# Altium PCB PCB5.PcbDoc
Units mm, origin at the board's own origin, x right, y up, seen from the top; angles counter-clockwise.
Board outline 110.24 x 88.14 mm, 2 copper layers (Top Layer, Bottom Layer); 52 components, 59 nets, 232 pads, 8 vias.
Unrouted connection lines stored in the file: 9.
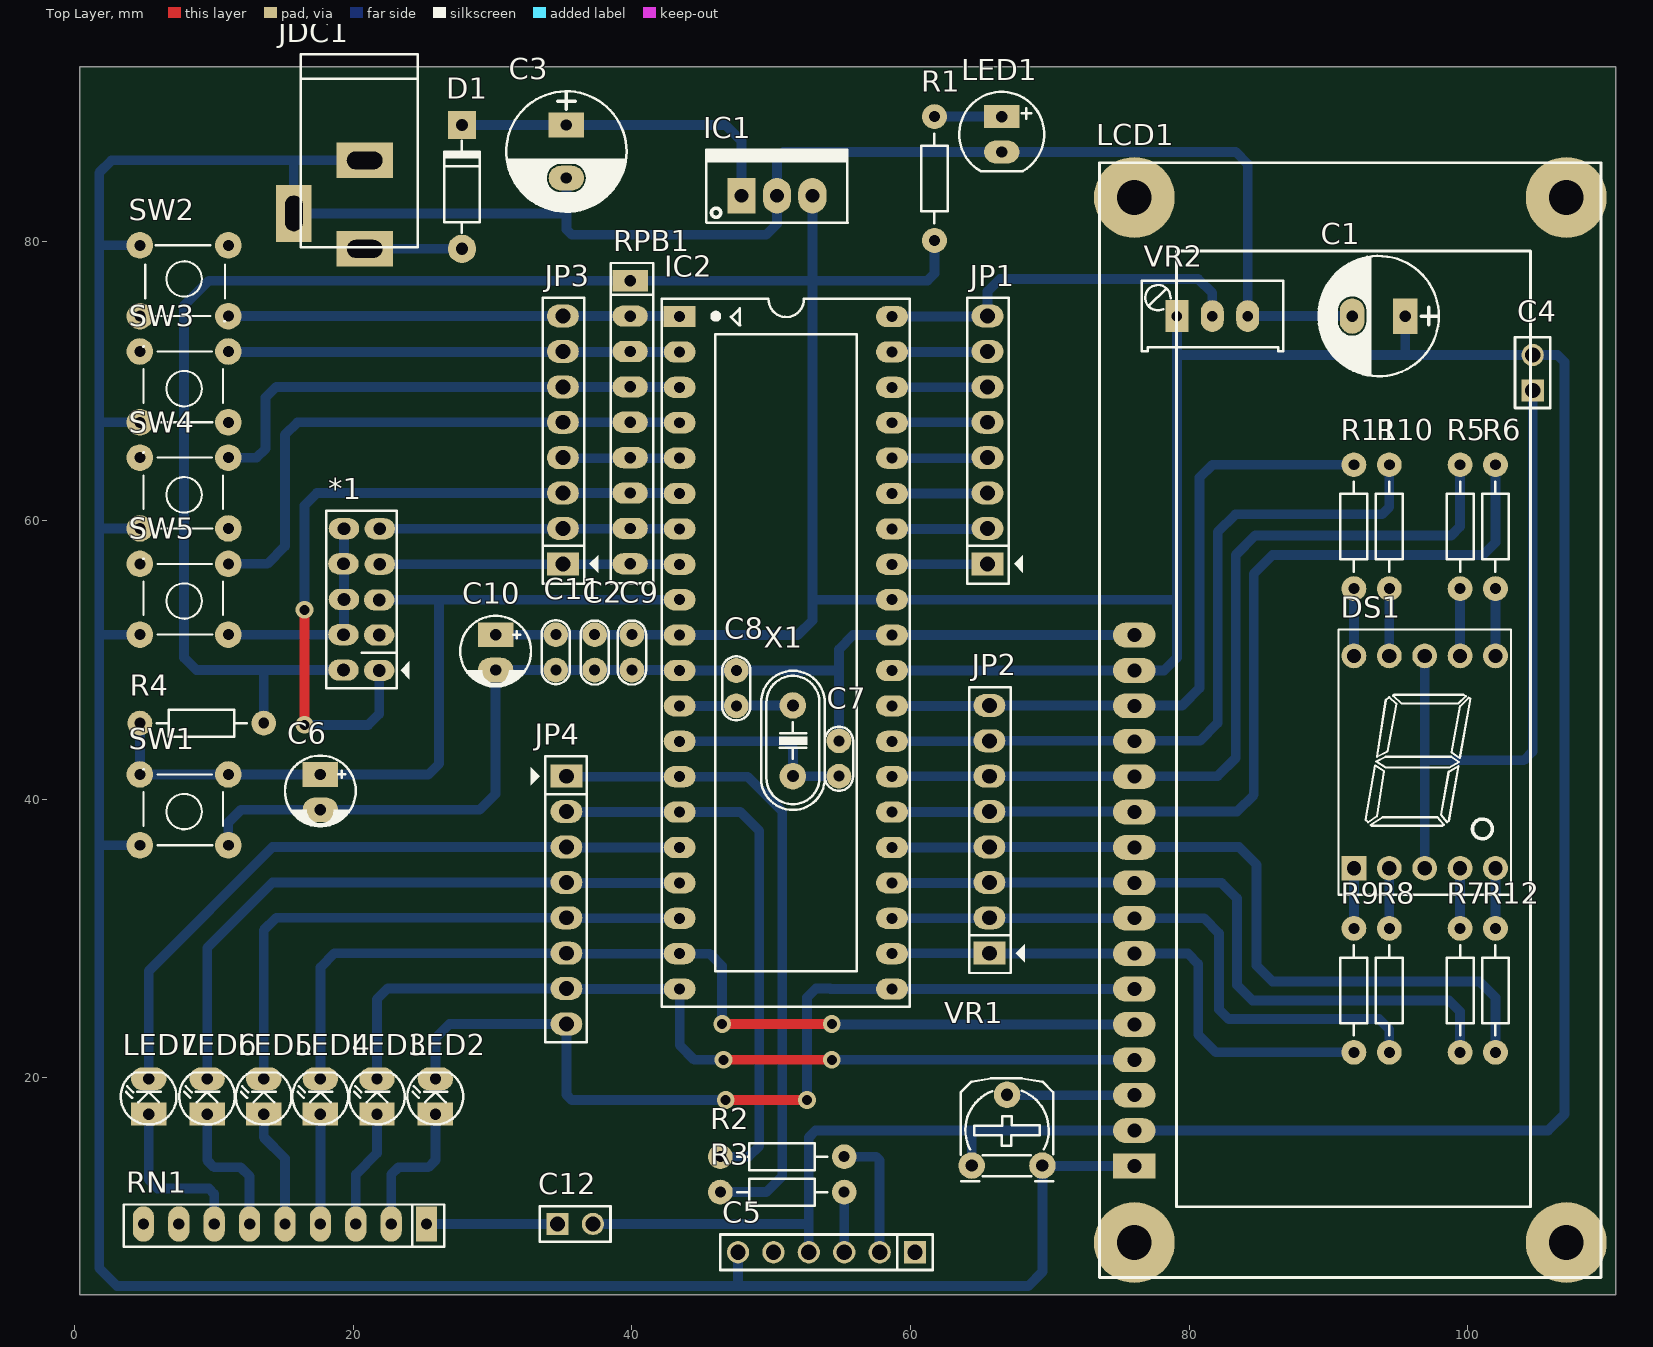
[diagram p0: Top Layer view]
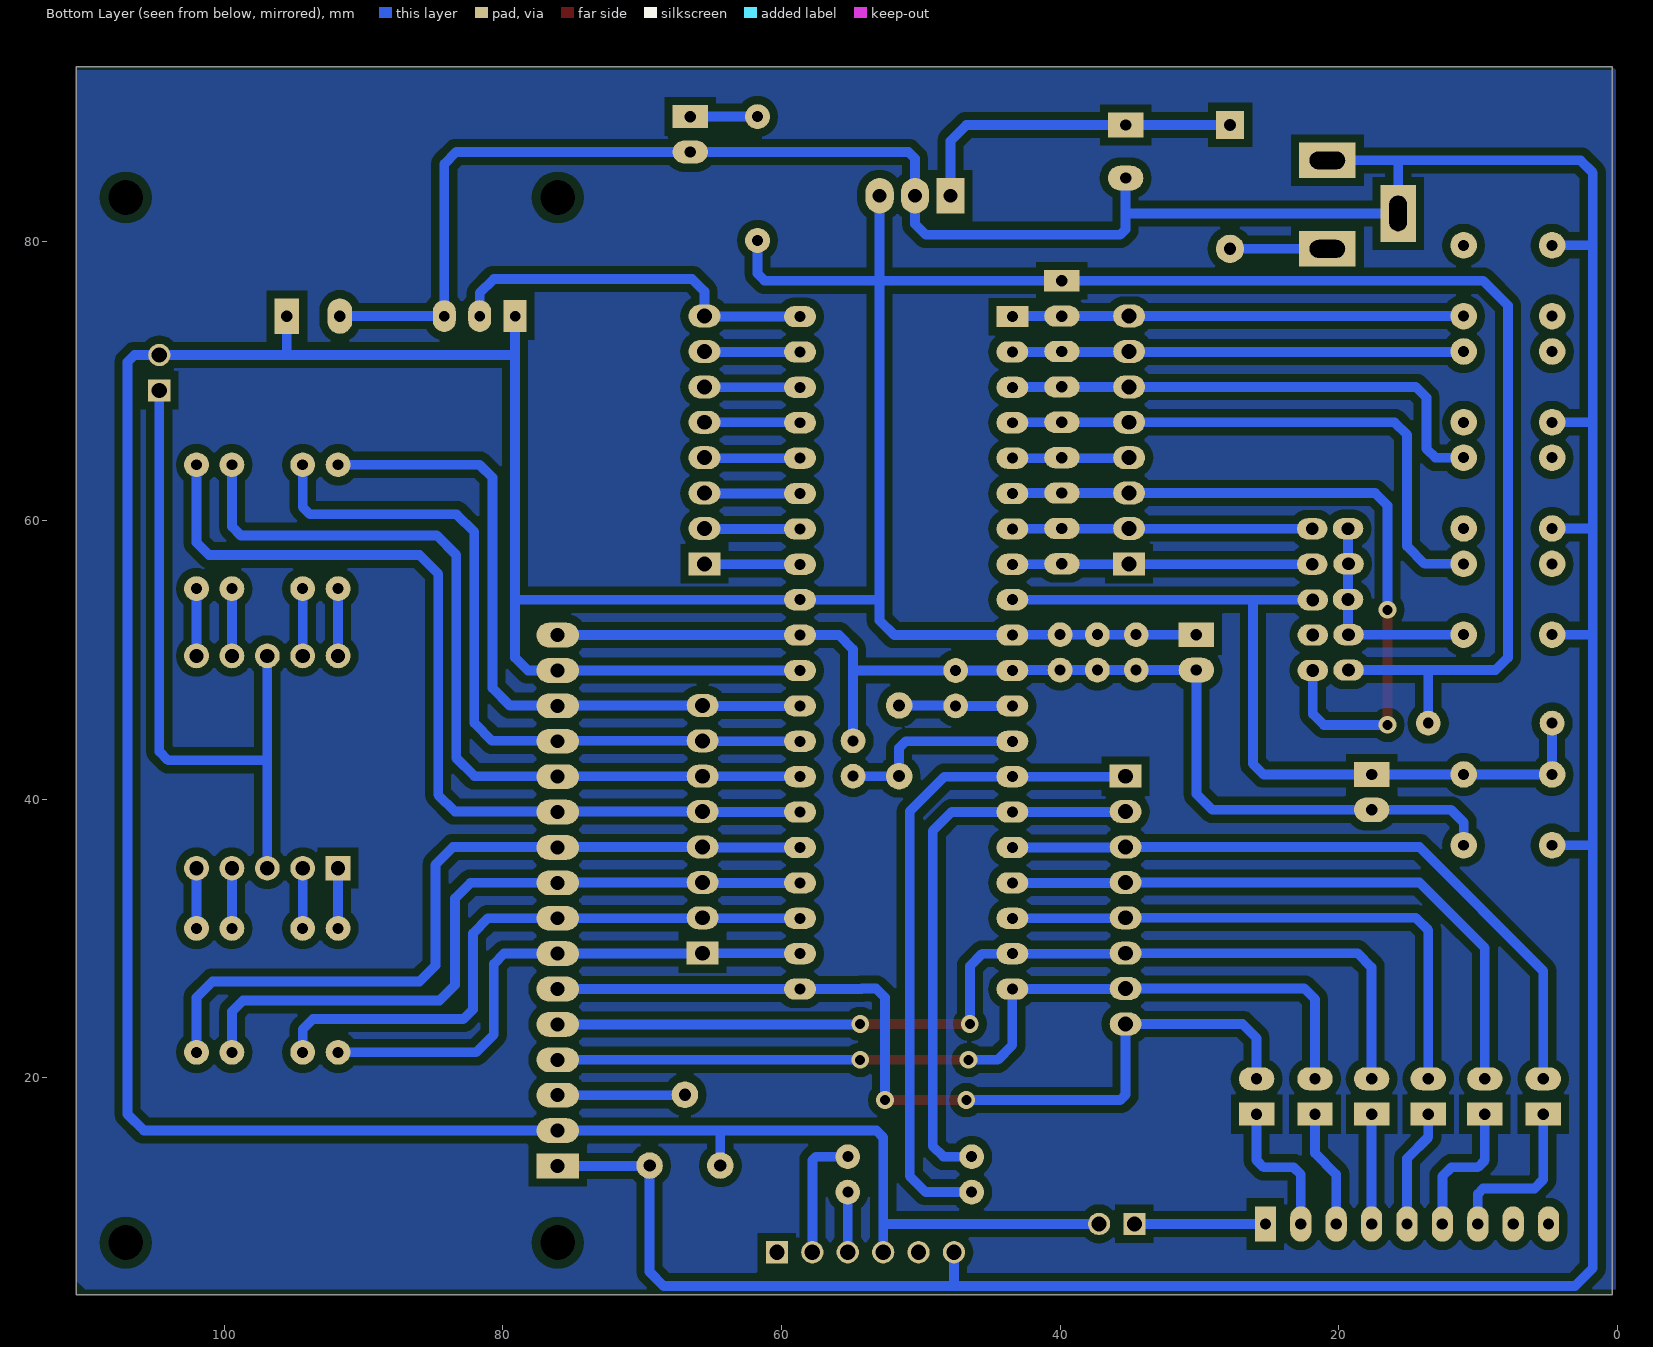
[diagram p1: Bottom Layer view, seen from below]
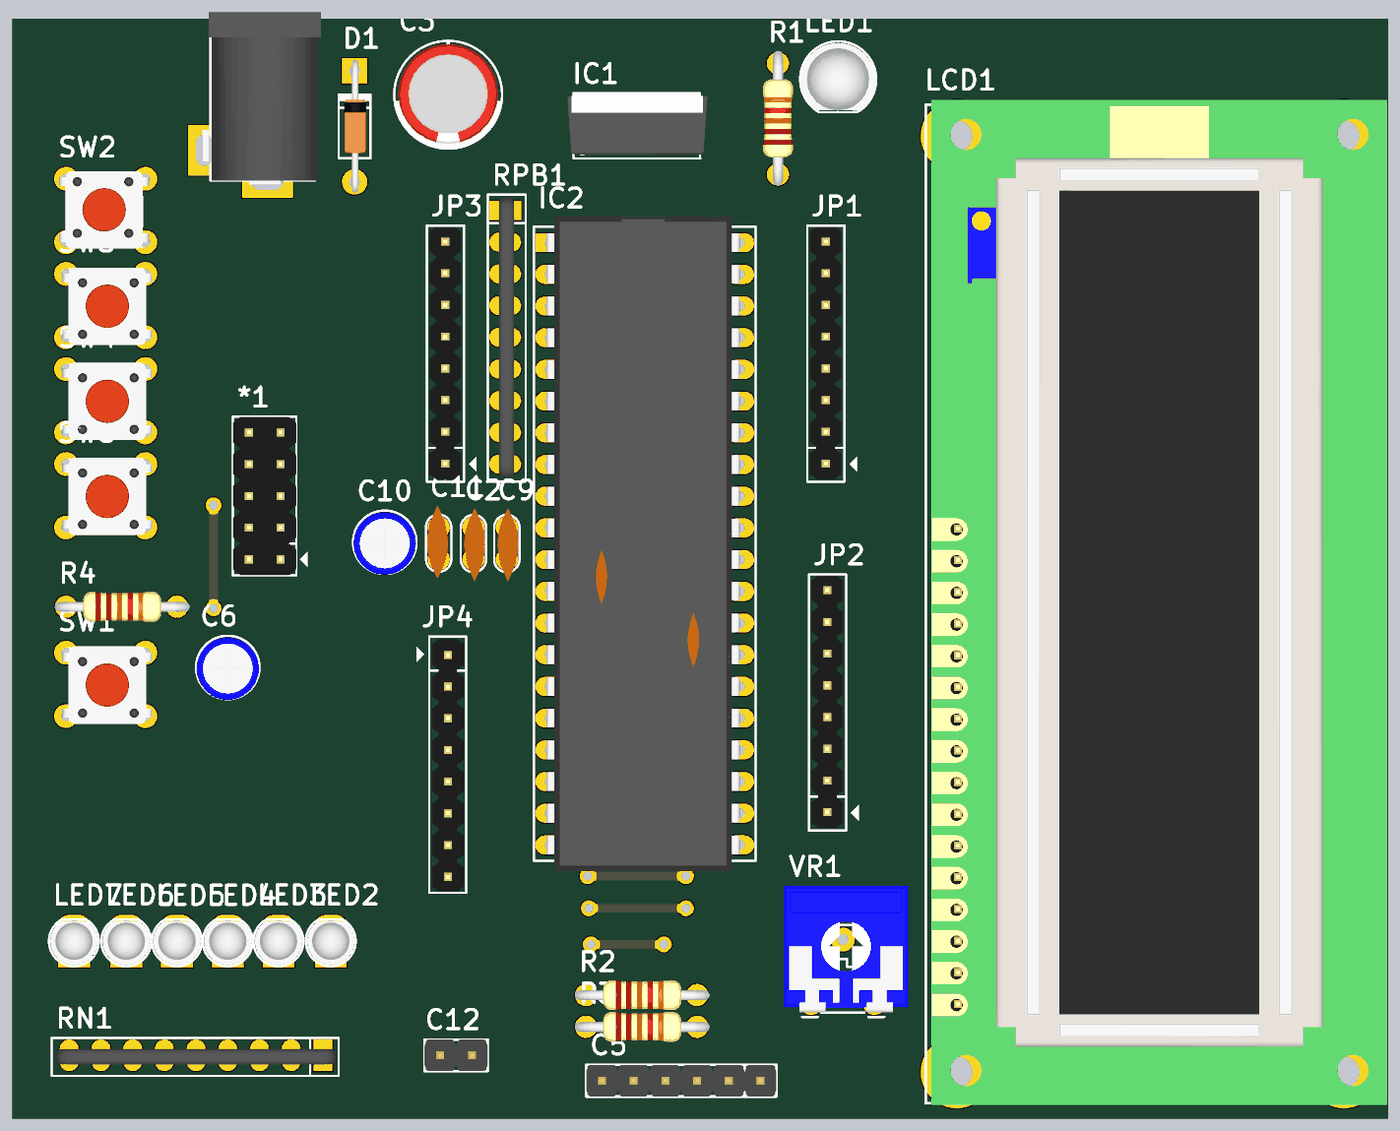
[diagram p2: 3D render of the assembled board from above, using the file's embedded part models]

## Layer stack, top to bottom
Top Solder: solder mask 0.0102, Solder Resist, Dk 3.5
Top Layer: signal copper 0.0356
Dielectric 1: dielectric 0.32, FR-4, Dk 4.8
Bottom Layer: signal copper 0.0356
Bottom Solder: solder mask 0.0102, Solder Resist, Dk 3.5

## Board outline
0.381,4.445 110.617,4.445 110.617,92.583 0.381,92.583

## Design rules (kind name [scope] priority, off if disabled: settings)
Clearance [All] p1: gap=0.6 ignorepadtopadclearanceinfootprint=FALSE
PolygonConnect [All] p1: connectstyle=Relief reliefconductorwidth=0.254 reliefentries=4 polygonreliefangle="90 Angle" airgapwidth=0.254
RoutingVias [All] p1: holewidth=0.711 width=1.27 viastyle="Through Hole" minholewidth=0.711 minwidth=1.27 maxholewidth=0.711 maxwidth=1.27
SolderMaskExpansion [All] p1: expansion=0.102 istentingtop=FALSE
Width [All] p1: maxlimit=0.7 minlimit=0.7 preferedwidth=0.7
30 further rules are at their usual default settings.

## Components (designator, comment, footprint, x,y, rotation, side; value= is the part's Value field where it differs from the comment)
*1 "JP5X2" JP5X2 21.882,49.263 r90 top
C1 "1000uF/16V" CP1.5/3.4 95.504,74.676 r180 top
C2 "100pF" CN1 37.338,51.816 r270 top
C3 "1000uF/16V" CP1.5/3.4 35.306,88.392 r270 top
C4 "JP2" JP2-D1T 104.648,69.342 r90 top
C5 "JP6" JP6-D1T 60.325,7.493 r180 top
C6 "10uF" CP1/2 17.653,41.783 r270 top value=10uF/50V
C7 "22pF" CN1 54.864,44.196 r270 top value=100pF
C8 "22pF" CN1 47.498,49.241 r270 top value=100pF
C9 "100pF" CN1 40.005,51.816 r270 top
C10 "10uF" CP1/2 30.226,51.816 r270 top value=10uF/50V
C11 "100pF" CN1 34.544,49.276 r90 top
C12 "JP2" JP2-D1T 34.671,9.525 r0 top
D1 "1N4007" D1A 27.813,79.502 r270 top
DS1 "7SEG" LED7SEG-1-0.56 96.774,42.037 r0 top
IC1 "LM7805" QTO-220 47.879,83.312 r0 top
IC2 "ATMEL 16A" DIP40/W0.6 43.434,74.641 r270 top value="Atmega 16L"
JDC1 "Jac DC" DC-IN 18.288,82.677 r270 top
JP1 "JP8 PIN" JP8 65.532,56.896 r90 top value=JP7
JP2 "JP8 PIN" JP8 65.659,28.956 r90 top value=JP7
JP3 "JP8 PIN" JP8 35.052,56.896 r90 top value=JP7
JP4 "JP8 PIN" JP8 35.306,41.656 r270 top value=JP7
LCD1 "LCD16x2A" LCD16X2 76.061,13.685 r90 top
LED1 "LED" LED-5-RED 66.548,88.992 r270 top value="LED 3 ly Single Colour"
LED2 "LED" LED-3 25.908,17.399 r90 top value="LED 3 ly Single Colour"
LED3 "LED" LED-3 21.717,17.399 r90 top value="LED 3 ly Single Colour"
LED4 "LED" LED-3 17.653,17.399 r90 top value="LED 3 ly Single Colour"
LED5 "LED" LED-3 13.589,17.399 r90 top value="LED 3 ly Single Colour"
LED6 "LED" LED-3 9.525,17.399 r90 top value="LED 3 ly Single Colour"
LED7 "LED" LED-3 5.334,17.399 r90 top value="LED 3 ly Single Colour"
R1 "Res1" R1/4W 61.722,88.992 r270 top value=330R
R2 "Res1" R1/4W 55.245,14.351 r180 top value=100R
R3 "Res1" R1/4W 55.245,11.811 r180 top value=100R
R4 "Res1" R1/4W 13.589,45.466 r180 top value=10k
R5 "Res1" R1/4W 99.441,55.118 r90 top value=1k
R6 "Res1" R1/4W 101.981,55.118 r90 top value=1k
R7 "Res1" R1/4W 99.441,30.734 r270 top value=1k
R8 "Res1" R1/4W 94.361,30.734 r270 top value=1k
R9 "Res1" R1/4W 91.821,30.734 r270 top value=1k
R10 "Res1" R1/4W 94.361,55.118 r90 top value=1k
R11 "Res1" R1/4W 91.821,55.118 r90 top value=1k
R12 "Res1" R1/4W 101.981,30.734 r270 top value=1k
RN1 "1K" RN8 25.273,9.525 r180 top value="Tro thanh 10K"
RPB1 "10K" RN8 39.878,77.216 r270 top value="Tro thanh 10K"
SW1 "SW" SW4 11.049,36.703 r180 top value="Button chip 4 pin"
SW2 "SW" SW4 4.699,79.756 r0 top value="Button chip 4 pin"
SW3 "SW" SW4 11.049,67.056 r180 top value="Button chip 4 pin"
SW4 "SW" SW4 11.049,59.436 r180 top value="Button chip 4 pin"
SW5 "SW" SW4 11.049,51.816 r180 top value="Button chip 4 pin"
VR1 "10K" VR 64.389,13.716 r0 top value="VR 10K"
VR2 "10K" VR1 79.121,74.676 r0 top value="VR 10K"
X1 "8Mhz" XT2 51.562,44.196 r270 top value=4Mhz

## Footprints (in the part's own frame and the unit in brackets; to place one, negate y for a bottom-side part, rotate by r counter-clockwise, add the part's x,y. Pads: shape width x height; smd on the part's side, far side on the other; paste and mask are expansions set on the pad)
CN1 [mil]
  round 70 hole 31: 1(0,0) 2(100,0)
  silkscreen extent -40,-40 141,40, body extent -60,-30 170,37, height 265
CP1.5/3.4 [mil] "Tu hoa 220->470uF,16V, 470uF/16V,25V"
  rect 70x100 hole 32: 1(0,0)
  oval 70x100 hole 32: 2(150,0)
  silkscreen extent -95,-170 245,170, body extent -85,-157 230,157, height 446
CP1/2 [mil] "Tu hoa < 22uF/16>50V"
  rect 70x100 hole 32: 1(0,0)
  oval 70x100 hole 32: 2(100,0)
  silkscreen extent -53,-100 146,100, body extent -49,-99 149,99, height 287
D1A [mil] "Diode 1A, W 100mil, L 350mil"
  round 80 hole 35: 1(0,0)
  rect 80x80 hole 35: 2(-350,0)
  silkscreen extent -305,-50 -45,50, body extent -386,-33 34,36, height 84
DC-IN [mil] "Jac DC input"
  rect 100x160 hole 50 slot 100 at 90 deg: 1(125,100) 2(-125,100)
  rect 160x100 hole 50 slot 100 at 0 deg: 3(25,-100)
  silkscreen extent -425,-80 120,250, body extent -410,-105 134,269, height 434
DIP40/W0.6 [mil] "40 PIN, W 600mil, Pin to pin 100mil"
  rect 60x90 hole 31: 1(0,0)
  oval 60x90 hole 31: 2(100,0) 3(200,0) 4(300,0) 5(400,0) 6(500,0) 7(600,0) 8(700,0) 9(800,0) 10(900,0) 11(1000,0) 12(1100,0) 13(1200,0) 14(1300,0) 15(1400,0) 16(1500,0) 17(1600,0) 18(1700,0) 19(1800,0) 20(1900,0) 21(1900,600) 22(1800,600) 23(1700,600) 24(1600,600) 25(1500,600) 26(1400,600) 27(1300,600) 28(1200,600) 29(1100,600) 30(1000,600) 31(900,600) 32(800,600) 33(700,600) 34(600,600) 35(500,600) 36(400,600) 37(300,600) 38(200,600) 39(100,600) 40(0,600)
  silkscreen extent -50,-50 1950,650, body extent -82,-10 1982,600, height 224
JP2-D1T [mm] "2 pins, 1 row, straight, gold plating"
  rect 1.6x1.6 hole 1.1: 1(0,0)
  round 1.6 hole 1.1: 2(2.54,0)
  silkscreen extent -1.27,-1.27 3.81,1.27, body extent -1.27,-1.27 3.81,1.27, height 8.54
JP5X2 [mil]
  oval 60x86 hole 36: 1(-0.5,0.5) 2(99.5,0.5) 3(198.5,0.5) 4(299.5,-1.5) 5(399.5,-1.5) 6(0.5,101.5) 7(100.5,101.5) 8(200,100) 9(300.5,101.5) 10(400,100)
  silkscreen extent -51,-85 450,151, body extent -50,-50 450,150, height 335
JP6-D1T [mm] "6 pins, 1 row, straight, gold plating"
  rect 1.6x1.6 hole 1.1: 1(0,0)
  round 1.6 hole 1.1: 2(2.54,0) 3(5.08,0) 4(7.62,0) 5(10.16,0) 6(12.7,0)
  silkscreen extent -1.27,-1.27 13.97,1.27, body extent -1.27,-1.27 13.97,1.27, height 8.54
JP8 [mil] "JP8"
  rect 65x90 hole 42: 1(0,0)
  oval 65x90 hole 42: 2(100,0) 3(200,0) 4(300,0) 5(400,0) 6(500,0) 7(600,0) 8(700,0)
  silkscreen extent -56,-100 752,57, body extent -48,-50 748,48, height 323
LCD16X2 [mm] "LCD dipslay 16x2, 16 pin"
  rect 1.778x3.048 hole 1: 1(0,0)
  oval 1.778x3.048 hole 1: 2(2.54,0) 3(5.08,0) 4(7.62,0) 5(10.16,0) 6(12.7,0) 7(15.24,0) 8(17.78,0) 9(20.32,0) 10(22.86,0) 11(25.4,0) 12(27.94,0) 13(30.48,0) 14(33.02,0) 15(35.56,0) 16(38.1,0)
  round 5.8 / inner round 0 / far side round 0 hole 2.5 unplated: M1(-5.5,0) M2(69.5,0) M3(-5.5,-31) M4(69.5,-31)
  silkscreen extent -8,-33.5 72,2.5, body extent -8.13,-34.47 72.37,2.03, height 18.14
LED7SEG-1-0.56 [mil]
  rect 70x70 hole 40: 1(-195,-275)
  round 70 hole 40: 2(-95,-275) 3(5,-275) 4(105,-275) 5(205,-275) 6(205,325) 7(105,325) 8(5,325) 9(-95,325) 10(-195,325)
  silkscreen extent -239,-350 249,400, body extent -241,-349 251,399, height 315
LED-3 [mil] "LED 2 PIN, 3ly Only colour"
  rect 65x100 hole 32: 1(0,0)
  oval 65x100 hole 32: 2(100,0)
  silkscreen extent -29,-78 118,79, body extent -25,-75 113,75, height 217
LED-5-RED [mil] "LED 2 PIN, 5 ly , Only colour,pin to pin 100mil"
  rect 65x100 hole 32: 1(0,0)
  oval 65x100 hole 32: 2(100,0)
  silkscreen extent -70,-120 154,120, body extent -65,-119 149,118, height 339
QTO-220 [mil] "TO-220 - 1-2-3"
  rect 80x100 hole 39: 1(0,0)
  oval 80x100 hole 39: 2(100,0) 3(200,0)
  silkscreen extent -100,-76 300,130, body extent -119,-64 322,121, height 755
R1/4W [mil] "R 1/4W, 2 Pin, 350mil"
  round 70 hole 31: 1(0,0) 2(350,0)
  silkscreen extent 48,-38 302,38, body extent -40,-47 386,47, height 111
RN8 [mil] "R SIP8, 9 Pin"
  rect 60x100 hole 32: 1(0,0)
  oval 60x100 hole 32: 2(100,0) 3(200,0) 4(300,0) 5(400,0) 6(500,0) 7(600,0) 8(700,0) 9(800,0)
  silkscreen extent -50,-55 855,65, body extent -43,-20 843,29, height 219
SW4 [mil] "SW button 4pin, 250 x250 mil"
  round 75 hole 31: 1(0,0) 2(250,-200) 3(250,0) 4(0,-200)
  silkscreen extent 15,-215 240,0, body extent -36,-220 276,24, height 276
VR [mil] "Resistor Variable"
  round 75 hole 35: 1(0,0) 2(100,200) 3(200,0)
  silkscreen extent -31,-44 231,246, body extent -87,-30 307,372, height 165
VR1 [mil] "Variable Resistor"
  rect 65x90 hole 30: 1(0,0)
  oval 65x90 hole 30: 2(100,0) 3(200,0)
  silkscreen extent -100,-100 301,100, body extent -88,-130 288,110, height 455
XT2 [mil] "Footpin for Crystal 2 pin"
  round 75 hole 34: 1(-100,0) 2(100,0)
  silkscreen extent -198,-90 195,90, body extent -233,-93 213,90, height 138

## Part data
C1 C3: library part CP4, "Cap 1000uF/16V - 220uF/50V", Description 1="2200uF-3300uF/6,3V - 1000uF-2200uF/10V", Description 2="1000uF/16V - 470uF => 1000uF/25V - 100uF/100V", Description 3=330uF>470uF/35V_220uF>470uF/50V_10uF>22uF/250V, Description 4="220uF => 330uF/63V - 10uF =>33uF/160 - 200V", Description 5="4,7uF>10uF/250V_3,3uF>10uF/400V - 2,2uF>4,7uF/450V"
C2 C7 C8 C9 C11: library part CN1, "Cap np  1pF - 472pF"
C4 C12: "WR-PHD 2.54 mm Angled Socket Header", Manufacturer="W¨¹rth Elektronik eiSos GmbH", partNo=613002143121, ComponentLink1 Description=Manufacturer, ComponentLink1URL=http://www.we-online.com, ComponentLink2 Description=Datasheet, ComponentLink2URL=http://katalog.we-online.de/em/datasheet/6130xx143121.pdf, Created by="Karrer Zheng", Created Date="29 March 2013", NoPins=02
C5: "WR-PHD 2.54 mm Angled Socket Header", Manufacturer="W¨¹rth Elektronik eiSos GmbH", partNo=613006143121, ComponentLink1 Description=Manufacturer, ComponentLink1URL=http://www.we-online.com, ComponentLink2 Description=Datasheet, ComponentLink2URL=http://katalog.we-online.de/em/datasheet/6130xx143121.pdf, Created by="Karrer Zheng", Created Date="29 March 2013", NoPins=06
C6 C10: library part CP1, "Cap P  0,1uF < 22uF , 16 - 50V", Description 1="10 => 220uF/6,3V/10V - 10uF => 100uF/16V", Description 2="0,1uF => 33uF/50V - 10uF => 22uF/63V", Description 3="0,47uF => 10uF/100V"
D1: library part D1A, "Diode 1A"
DS1: library part LED7SEG-1, "14.2 mm General Purpose Blue 7-Segment Display: CC, RH DP, Gray Surface", Colour=Blue, PackageDocument=24-Sep-2002, ComponentLink1Description="Manufacturer Link", ComponentLink1URL=http://www.agilent.com/, DatasheetDocument=24-Sep-2002, LatestRevisionDate=17-Dec-2003, LatestRevisionNote="Schematic revised, PCB Footprint replaced.", MinimumIntensity="2020 ucd", Note="IF = 10 mA", PackageReference=H, Published=8-Jun-2000, Publisher="Altium Limited"
IC1: library part LM78xx, "On ap +, from + 5 to + 24VDC", =LM7808
IC2: library part ATmega16A-PU, "8-Bit AVR Microcontroller with 16K Bytes of In-System Programmable Flash Memory"
JDC1: library part DCIN, "Jac DC input"
JP1 JP2 JP3 JP4: library part JP8
LCD1: library part LCD16x2, "LCD dipslay 16 char, 2 line"
LED1 LED2 LED3 LED4 LED5 LED6 LED7: "LED Single colour Green and Red"
R1 R2 R3 R4 R5 R6 R7 R8 R9 R10 R11 R12: library part Res1_1, "Resistor", Manufacturer="Generic Components", Class=Passive, Published=08/06/2000, Publisher="Altium Hobart Technology Centre", SubClass=Resistor
RN1 RPB1: library part RN8, "Resistor 8 (Thanh)"
SW1 SW2 SW3 SW4 SW5: library part SW4, "Switch button 4 pin"
VR1: library part VR1, "Var Resistor"
VR2: library part VR, "Var Resistor"
X1: library part XT2, "Crystal For all Crystal 2pin."

## Via types
v1: diameter 1.27, hole 0.711, Top Layer to Bottom Layer, 8 vias

## Nets (pads, with @x,y where several pads share a name; then routed paths per layer and width w, separated by ;. In a path a pad name is that pad's centre, name@x,y a point inside that pad or via, vN(x,y) a via of type N, cw(c..) or ccw(c..) an arc to the next point about the centre after c; other vN are vias at no path point)
+5: *1.6 C1.1 C2.1 C4.2 C5.4 C9.1 C10.1 C11.2 C12.2 IC1.3 IC2.10 IC2.30 IC2.32 LCD1.2 LCD1.15 R1.2 R4.1 RPB1.1 VR1.1 VR2.1 | length 389.7
  Bottom Layer w0.7: R4.1 13.589,49.149 13.462,49.276 ; *1.6 13.462,49.276 ; C10.1 C11.2 C2.1 C9.1 43.399,51.816 IC2.10 51.908,51.781 52.959,52.832 52.959,54.321 ; C12.2@37.338,9.652 C12.2 52.578,9.525 52.705,9.652 ; C5.4 52.705,9.652 ; IC1.3 52.959,77.343 ; IC2.30 76.057,49.241 LCD1.15 78.201,49.245 79.121,50.165 79.121,54.229 ; R1.2 61.722,77.724 61.214,77.216 53.086,77.216 52.959,77.343 ; VR1.1 64.389,16.225 ; VR2.1 79.121,71.755 ; C1.1 95.504,72.009 95.631,71.882 ; 13.462,49.276 8.763,49.276 7.874,50.165 7.874,75.438 9.652,77.216 RPB1.1 52.959,77.216 ; 52.705,9.652 52.705,15.748 53.182,16.225 64.389,16.225 ; 52.959,54.321 IC2.32 79.029,54.321 79.121,54.229 ; 52.959,54.321 52.959,77.216 ; 52.959,77.216 52.959,77.343 ; 64.389,16.225 LCD1.2 105.76,16.225 106.934,17.399 106.934,71.374 106.426,71.882 C4.2 95.631,71.882 ; 79.121,54.229 79.121,71.755 ; 79.121,71.755 79.248,71.882 95.631,71.882
+12: D1.1 JDC1.1 | length 7
  Bottom Layer w0.7: JDC1.1 D1.1
AVR_RX: IC2.14 JP4.1 R3.2 | length 47.6
  Bottom Layer w0.7: JP4.1 35.341,41.621 IC2.14 48.295,41.621 50.8,39.116 50.8,12.954 49.657,11.811 R3.2
AVR_TX: IC2.15 JP4.2 R2.2 | length 40.1
  Bottom Layer w0.7: JP4.2 35.341,39.081 IC2.15 47.787,39.081 49.149,37.719 49.149,15.113 48.387,14.351 R2.2
GND: *1.7 *1.8 *1.9 *1.10 C1.2 C2.2 C3.2 C5.6 C6.2 C7.1 C8.1 C9.2 C10.2 C11.1 IC1.2 IC2.11 IC2.31 JDC1.2 JDC1.3 LCD1.1 LCD1.16 LED1.2 SW1.1 SW1.3 SW2.1 SW2.3 SW3.1 SW3.3 SW4.1 SW4.3 SW5.1 SW5.3 VR1.3 VR2.3 | length 397.3
  Bottom Layer w0.7: 1.905,36.703 SW1.3 ; SW5.3 1.778,51.816 ; SW4.3 1.778,59.436 ; SW3.3 1.778,67.056 ; SW2.1 1.905,79.756 1.778,79.629 ; SW1.1 11.049,38.354 11.938,39.243 C6.2 29.083,39.243 30.226,40.386 C10.2 C11.1 C2.2 C9.2 43.399,49.276 IC2.11 C8.1 54.772,49.241 54.864,49.149 ; SW5.1 *1.7 19.342,51.854 *1.8 *1.10 ; JDC1.2 15.875,85.852 ; C3.2 35.306,82.042 ; C5.6 47.625,5.08 ; C7.1 54.864,49.149 ; LCD1.1 69.5,13.685 VR1.3 69.469,6.096 68.453,5.08 47.625,5.08 ; LCD1.16 76.057,51.781 IC2.31 55.88,51.781 54.864,50.765 54.864,49.149 ; C1.2 VR2.3 84.201,85.598 83.347,86.452 LED1.2 50.892,86.452 50.419,85.979 IC1.2 50.419,81.28 49.657,80.518 35.687,80.518 35.306,80.899 35.306,82.042 ; 1.778,51.816 1.778,6.35 3.048,5.08 47.625,5.08 ; 1.778,51.816 1.778,59.436 ; 1.778,59.436 1.778,67.056 ; 1.778,67.056 1.778,79.629 ; 1.778,79.629 1.778,84.963 2.667,85.852 15.875,85.852 ; 15.875,85.852 15.748,85.725 JDC1.3 35.306,82.042
MISO: *1.5 IC2.7 JP3.2 RPB1.8 | length 21.5
  Bottom Layer w0.7: *1.5 21.933,59.423 43.412,59.423 IC2.7
MOSI: *1.1 IC2.6 JP3.3 RPB1.7 | length 51.9
  Top Layer w0.7: v1(16.51,45.339) v1(16.51,53.594)
  Bottom Layer w0.7: v1(16.51,45.339) 21.082,45.339 21.869,46.126 *1.1 ; v1(16.51,53.594) 16.51,61.087 17.399,61.976 JP3.3 RPB1.7 43.399,61.976 IC2.6
NetC3_1: C3.1 D1.2 IC1.1 | length 24.5
  Bottom Layer w0.7: D1.2 C3.1 46.736,88.392 47.879,87.249 IC1.1
NetC4_1: C4.1 DS1.3 DS1.8 | length 49.2
  Bottom Layer w0.7: DS1.3 96.901,42.799 ; DS1.8 96.901,42.799 ; C4.1 104.648,43.434 104.013,42.799 96.901,42.799
NetC5_2: C5.2 R2.1 | length 9.2
  Bottom Layer w0.7: R2.1 57.531,14.351 57.785,14.097 C5.2
NetC5_3: C5.3 R3.1 | length 4.3
  Bottom Layer w0.7: C5.3 R3.1
NetC12_1: C12.1 RN1.1 | length 9.4
  Bottom Layer w0.7: RN1.1 C12.1
NetDS1_1: DS1.1 R9.1 | length 4.3
  Bottom Layer w0.7: R9.1 DS1.1
NetDS1_2: DS1.2 R8.1 | length 4.3
  Bottom Layer w0.7: R8.1 DS1.2
NetDS1_4: DS1.4 R7.1 | length 4.3
  Bottom Layer w0.7: R7.1 DS1.4
NetDS1_5: DS1.5 R12.1 | length 4.3
  Bottom Layer w0.7: R12.1 DS1.5
NetDS1_6: DS1.6 R6.1 | length 4.8
  Bottom Layer w0.7: DS1.6 R6.1
NetDS1_7: DS1.7 R5.1 | length 4.8
  Bottom Layer w0.7: DS1.7 R5.1
NetDS1_9: DS1.9 R10.1 | length 4.8
  Bottom Layer w0.7: DS1.9 R10.1
NetDS1_10: DS1.10 R11.1 | length 4.8
  Bottom Layer w0.7: DS1.10 R11.1
NetLCD1_3: LCD1.3 VR1.2 | length 9.1
  Bottom Layer w0.7: VR1.2 66.96,18.765 LCD1.3
NetLED1_1: LED1.1 R1.1 | length 4.8
  Bottom Layer w0.7: R1.1 LED1.1
NetLED2_1: LED2.1 RN1.2 | length 10.5
  Bottom Layer w0.7: RN1.2 22.733,13.081 23.241,13.589 25.4,13.589 25.908,14.097 LED2.1
NetLED3_1: LED3.1 RN1.3 | length 8.5
  Bottom Layer w0.7: RN1.3 20.193,13.081 21.717,14.605 LED3.1
NetLED4_1: LED4.1 RN1.4 | length 7.9
  Bottom Layer w0.7: RN1.4 LED4.1
NetLED5_1: LED5.1 RN1.5 | length 8.5
  Bottom Layer w0.7: LED5.1 13.589,15.748 15.113,14.224 RN1.5
NetLED6_1: LED6.1 RN1.6 | length 10.3
  Bottom Layer w0.7: LED6.1 9.525,14.097 10.033,13.589 11.938,13.589 12.573,12.954 RN1.6
NetLED7_1: LED7.1 RN1.7 | length 12
  Bottom Layer w0.7: LED7.1 5.334,12.7 5.969,12.065 9.652,12.065 10.033,11.684 RN1.7
PA0: IC2.40 JP1.8 VR2.2 | length 27.2
  Bottom Layer w0.7: IC2.40 65.497,74.641 JP1.8 65.532,76.454 66.421,77.343 80.645,77.343 81.661,76.327 VR2.2
PA1: IC2.39 JP1.7 | length 6.9
  Bottom Layer w0.7: IC2.39 65.497,72.101 JP1.7
PA2: IC2.38 JP1.6 | length 6.9
  Bottom Layer w0.7: IC2.38 65.497,69.561 JP1.6
PA3: IC2.37 JP1.5 | length 6.9
  Bottom Layer w0.7: IC2.37 58.709,67.056 JP1.5
PA4: IC2.36 JP1.4 | length 6.9
  Bottom Layer w0.7: IC2.36 65.497,64.481 JP1.4
PA5: IC2.35 JP1.3 | length 6.9
  Bottom Layer w0.7: IC2.35 65.497,61.941 JP1.3
PA6: IC2.34 JP1.2 | length 6.9
  Bottom Layer w0.7: IC2.34 65.497,59.401 JP1.2
PA7: IC2.33 JP1.1 | length 6.9
  Bottom Layer w0.7: IC2.33 65.497,56.861 JP1.1
PB0: IC2.1 JP3.8 RPB1.2 SW2.2 SW2.4 | length 32.4
  Bottom Layer w0.7: SW2.2 32.766,74.676 38.354,74.676 43.399,74.676 IC2.1
PB1: IC2.2 JP3.7 RPB1.3 SW3.2 SW3.4 | length 32.4
  Bottom Layer w0.7: SW3.4 11.084,72.101 IC2.2
PB2: IC2.3 JP3.6 RPB1.4 SW4.2 SW4.4 | length 36.7
  Bottom Layer w0.7: SW4.4 13.081,64.516 13.716,65.151 13.716,68.834 14.478,69.596 JP3.6 RPB1.4 43.399,69.596 IC2.3
PB3: IC2.4 JP3.5 RPB1.5 SW5.2 SW5.4 | length 41.3
  Bottom Layer w0.7: SW5.4 13.843,56.896 15.113,58.166 15.113,66.167 16.002,67.056 JP3.5 RPB1.5 43.399,67.056 IC2.4
PB4: IC2.5 JP3.4 RPB1.6 | length 8.4
  Bottom Layer w0.7: JP3.4@35.052,64.481 IC2.5
PC0: IC2.22 JP2.1 LCD1.7 R9.2 | length 39.1
  Bottom Layer w0.7: IC2.22 58.709,28.956 JP2.1 65.69,28.925 LCD1.7 79.914,28.925 80.645,28.194 80.645,23.114 81.915,21.844 R9.2
PC1: IC2.23 JP2.2 LCD1.8 R8.2 | length 43.9
  Bottom Layer w0.7: IC2.23 65.624,31.461 JP2.2 65.69,31.465 LCD1.8 81.057,31.465 82.139,30.383 82.139,24.922 82.834,24.227 93.629,24.227 94.361,23.495 R8.2
PC2: IC2.24 JP2.3 LCD1.9 R7.2 | length 51.2
  Bottom Layer w0.7: IC2.24 65.624,34.001 JP2.3 76.03,34.036 LCD1.9 82.327,34.005 83.439,32.893 83.439,26.67 84.552,25.557 98.649,25.557 99.441,24.765 R7.2
PC3: IC2.25 JP2.4 LCD1.10 R12.2 | length 56
  Bottom Layer w0.7: IC2.25 65.624,36.541 JP2.4 83.566,36.576 84.836,35.306 84.836,28.067 85.979,26.924 100.838,26.924 101.981,25.781 R12.2
PC4: IC2.26 JP2.5 LCD1.11 R6.2 | length 66.2
  Bottom Layer w0.7: IC2.26 65.624,39.081 JP2.5 83.439,39.116 84.642,40.319 84.642,56.194 85.979,57.531 101.092,57.531 101.981,58.42 R6.2
PC5: IC2.27 JP2.6 LCD1.12 R5.2 | length 61.2
  Bottom Layer w0.7: IC2.27 58.709,41.656 JP2.6 82.042,41.656 83.342,42.956 83.342,57.531 84.739,58.928 98.806,58.928 99.441,59.563 R5.2
PC6: IC2.28 JP2.7 LCD1.13 R10.2 | length 53.7
  Bottom Layer w0.7: IC2.28 65.624,44.161 JP2.7 80.772,44.196 82.042,45.466 82.042,59.182 83.312,60.452 93.853,60.452 94.361,60.96 R10.2
PC7: IC2.29 JP2.8 LCD1.14 R11.2 | length 49.2
  Bottom Layer w0.7: IC2.29 65.624,46.701 JP2.8 79.502,46.736 80.742,47.976 80.742,63.089 81.661,64.008 R11.2
PD2: IC2.16 JP4.3 LED7.2 | length 49.5
  Bottom Layer w0.7: LED7.2 5.334,27.686 14.224,36.576 JP4.3 35.341,36.541 IC2.16
PD3: IC2.17 JP4.4 LED6.2 | length 45.3
  Bottom Layer w0.7: LED6.2 9.525,29.337 14.224,34.036 JP4.4 35.341,34.001 IC2.17
PD4: IC2.18 JP4.5 LED5.2 | length 40.9
  Bottom Layer w0.7: LED5.2 13.589,30.607 14.478,31.496 JP4.5 35.341,31.461 IC2.18 IC2.18@43.399,31.496
PD5: IC2.19 JP4.6 LCD1.5 LED4.2 | length 71.4
  Top Layer w0.7: v1(46.482,23.876) v1(54.356,23.876)
  Bottom Layer w0.7: LED4.2 17.653,27.94 18.669,28.956 JP4.6 35.341,28.921 IC2.19 45.593,28.921 46.482,28.032 v1(46.482,23.876) ; v1(54.356,23.876) 54.387,23.845 58.801,23.845 LCD1.5
PD6: IC2.20 JP4.7 LCD1.4 LED3.2 | length 64.9
  Top Layer w0.7: v1(46.578,21.305) v1(54.356,21.305)
  Bottom Layer w0.7: LED3.2 21.717,25.654 22.479,26.416 JP4.7 35.341,26.381 IC2.20 43.434,22.352 44.481,21.305 v1(46.578,21.305) ; v1(54.356,21.305) LCD1.4
PD7: IC2.21 JP4.8 LCD1.6 LED2.2 | length 66.4
  Top Layer w0.7: v1(46.736,18.415) v1(52.578,18.415)
  Bottom Layer w0.7: LED2.2 25.908,22.86 26.924,23.876 JP4.8 35.306,18.796 35.687,18.415 v1(46.736,18.415) ; v1(52.578,18.415) 52.578,25.781 53.213,26.416 54.229,26.416 54.264,26.381 IC2.21 58.678,26.385 LCD1.6
RST: *1.3 C6.1 IC2.9 R4.2 SW1.2 SW1.4 | length 58.9
  Bottom Layer w0.7: R4.2 SW1.2 SW1.4 C6.1 25.4,41.783 26.162,42.545 26.162,54.191 26.289,54.318 ; *1.3 21.882,54.318 26.289,54.318 ; IC2.9 40.675,54.321 40.672,54.318 26.289,54.318
SCK: *1.4 IC2.8 JP3.1 RPB1.9 | length 21.5
  Bottom Layer w0.7: *1.4 IC2.8@43.424,56.871 ; IC2.8@43.412,56.883 IC2.8@43.424,56.871 ; IC2.8 IC2.8@43.424,56.871
XTAL1: C7.2 IC2.13 X1.2 | length 13.7
  Bottom Layer w0.7: IC2.13 51.089,44.161 51.562,43.688 X1.2 C7.2
XTAL2: C8.2 IC2.12 X1.1 | length 8.1
  Bottom Layer w0.7: IC2.12 C8.2 47.533,46.736 X1.1
pads on no net: *1.2 C5.1 C5.5 LCD1.M1 LCD1.M2 LCD1.M3 LCD1.M4 RN1.8 RN1.9

## Polygon pours and split planes (outlines as drawn)
no net on Bottom Layer "NONET_L02_P-001" (solid, pour order 14): 0.381,92.329 110.617,92.329 110.617,5.461 109.982,4.826 0.127,4.826 0.127,92.329 0.381,92.583